# EAGLE board 9x9_backpack (EAGLE 6.2)

Size 45.72 x 45.72 mm. Coordinates in mm from the lower left corner, seen from the top.
Outline: 0,43.18 0,2.54 arc90 2.54,0 43.18,0 arc90 45.72,2.54 45.72,43.18 arc90 43.18,45.72 2.54,45.72 arc90 0,43.18
Copper layers (1*16): Top 0.035mm / dielectric 1.5mm / Bottom 0.035mm
Design rules: minimum track width 10mil, minimum drill 12mil, track to track 6mil, track to pad 6mil, pad to pad 6mil, via to via 6mil, smd to smd 0mil, copper to edge 20mil, drill to drill 10mil, minimum pad ring 10mil, minimum via ring 6mil, stop-mask expansion 2mil, vias tented up to drill 100mil, thermal gap 10mil
Holes 3.2 mm at 5.08,5.08 5.08,40.64 40.64,5.08 40.64,40.64

## Footprints (pad centres in the part's own frame; a part is rotated, then mirrored left to right if it is on the bottom)
LED3MM = drill 0.813 octagon: A -1.27,0; K 1.27,0
1X01 = drill 1.016 octagon: 1 0,0
SOIC14 = smd 0.61 x 2.21: 1 -3.81,-2.603; 2 -2.54,-2.603; 3 -1.27,-2.603; 4 0,-2.603; 5 1.27,-2.603; 6 2.54,-2.603; 7 3.81,-2.603; 8 3.81,2.603; 9 2.54,2.603; 10 1.27,2.603; 11 0,2.603; 12 -1.27,2.603; 13 -2.54,2.603; 14 -3.81,2.603
1X04_LOCK = drill 1.016 pad 1.88 square: 1 0,0.127 | drill 1.016 pad 1.88: 2 2.54,-0.127; 3 5.08,0.127; 4 7.62,-0.127
1X06_LOCK = drill 1.016 pad 1.88: 1 0,0; 2 2.54,-0.254; 3 5.08,0; 4 7.62,-0.254; 5 10.16,0; 6 12.7,-0.254
R-6 = drill 0.6 pad 1.27: P$1 -3,0; P$2 3,0
C025-025X050 = drill 0.813 octagon: 1 -1.27,0; 2 1.27,0
SO20L = smd 0.66 x 2.032: 1 -5.715,-5.029; 2 -4.445,-5.029; 3 -3.175,-5.029; 4 -1.905,-5.029; 5 -0.635,-5.029; 6 0.635,-5.029; 7 1.905,-5.029; 8 3.175,-5.029; 9 4.445,-5.029; 10 5.715,-5.029; 11 5.715,5.029; 12 4.445,5.029; 13 3.175,5.029; 14 1.905,5.029; 15 0.635,5.029; 16 -0.635,5.029; 17 -1.905,5.029; 18 -3.175,5.029; 19 -4.445,5.029; 20 -5.715,5.029

## Placement (x,y rotation side)
00  [LED3MM]  2.54,2.54 0 top
01  [LED3MM]  7.62,2.54 0 top
02  [LED3MM]  12.7,2.54 0 top
03  [LED3MM]  17.78,2.54 0 top
04  [LED3MM]  22.86,2.54 0 top
05  [LED3MM]  27.94,2.54 0 top
06  [LED3MM]  33.02,2.54 0 top
07  [LED3MM]  38.1,2.54 0 top
08  [LED3MM]  43.18,2.54 0 top
10  [LED3MM]  2.54,7.62 0 top
11  [LED3MM]  7.62,7.62 0 top
12  [LED3MM]  12.7,7.62 0 top
13  [LED3MM]  17.78,7.62 0 top
14  [LED3MM]  22.86,7.62 0 top
15  [LED3MM]  27.94,7.62 0 top
16  [LED3MM]  33.02,7.62 0 top
17  [LED3MM]  38.1,7.62 0 top
18  [LED3MM]  43.18,7.62 0 top
20  [LED3MM]  2.54,12.7 0 top
21  [LED3MM]  7.62,12.7 0 top
22  [LED3MM]  12.7,12.7 0 top
23  [LED3MM]  17.78,12.7 0 top
24  [LED3MM]  22.86,12.7 0 top
25  [LED3MM]  27.94,12.7 0 top
26  [LED3MM]  33.02,12.7 0 top
27  [LED3MM]  38.1,12.7 0 top
28  [LED3MM]  43.18,12.7 0 top
30  [LED3MM]  2.54,17.78 0 top
31  [LED3MM]  7.62,17.78 0 top
32  [LED3MM]  12.7,17.78 0 top
33  [LED3MM]  17.78,17.78 0 top
34  [LED3MM]  22.86,17.78 0 top
35  [LED3MM]  27.94,17.78 0 top
36  [LED3MM]  33.02,17.78 0 top
37  [LED3MM]  38.1,17.78 0 top
38  [LED3MM]  43.18,17.78 0 top
40  [LED3MM]  2.54,22.86 0 top
41  [LED3MM]  7.62,22.86 0 top
42  [LED3MM]  12.7,22.86 0 top
43  [LED3MM]  17.78,22.86 0 top
44  [LED3MM]  22.86,22.86 0 top
45  [LED3MM]  27.94,22.86 0 top
46  [LED3MM]  33.02,22.86 0 top
47  [LED3MM]  38.1,22.86 0 top
48  [LED3MM]  43.18,22.86 0 top
50  [LED3MM]  2.54,27.94 0 top
51  [LED3MM]  7.62,27.94 0 top
52  [LED3MM]  12.7,27.94 0 top
53  [LED3MM]  17.78,27.94 0 top
54  [LED3MM]  22.86,27.94 0 top
55  [LED3MM]  27.94,27.94 0 top
56  [LED3MM]  33.02,27.94 0 top
57  [LED3MM]  38.1,27.94 0 top
58  [LED3MM]  43.18,27.94 0 top
60  [LED3MM]  2.54,33.02 0 top
61  [LED3MM]  7.62,33.02 0 top
62  [LED3MM]  12.7,33.02 0 top
63  [LED3MM]  17.78,33.02 0 top
64  [LED3MM]  22.86,33.02 0 top
65  [LED3MM]  27.94,33.02 0 top
66  [LED3MM]  33.02,33.02 0 top
67  [LED3MM]  38.1,33.02 0 top
68  [LED3MM]  43.18,33.02 0 top
70  [LED3MM]  2.54,38.1 0 top
71  [LED3MM]  7.62,38.1 0 top
72  [LED3MM]  12.7,38.1 0 top
73  [LED3MM]  17.78,38.1 0 top
74  [LED3MM]  22.86,38.1 0 top
75  [LED3MM]  27.94,38.1 0 top
76  [LED3MM]  33.02,38.1 0 top
77  [LED3MM]  38.1,38.1 0 top
78  [LED3MM]  43.18,38.1 0 top
80  [LED3MM]  2.54,43.18 0 top
81  [LED3MM]  7.62,43.18 0 top
82  [LED3MM]  12.7,43.18 0 top
83  [LED3MM]  17.78,43.18 0 top
84  [LED3MM]  22.86,43.18 0 top
85  [LED3MM]  27.94,43.18 0 top
86  [LED3MM]  33.02,43.18 0 top
87  [LED3MM]  38.1,43.18 0 top
88  [LED3MM]  43.18,43.18 0 top
H0  [1X01]  11.43,5.08 0 bottom
H1  [1X01]  13.97,5.08 0 bottom
H2  [1X01]  16.51,5.08 0 bottom
H3  [1X01]  19.05,5.08 0 bottom
H4  [1X01]  21.59,5.08 0 bottom
H5  [1X01]  24.13,5.08 0 bottom
H6  [1X01]  26.67,5.08 0 bottom
H7  [1X01]  29.21,5.08 0 bottom
H8  [1X01]  31.75,5.08 0 bottom
H9  [1X01]  34.29,5.08 0 bottom
H10  [SOIC14]  33.02,22.86 180 bottom
H11  [1X04_LOCK]  17.78,40.64 0 bottom
H12  [1X06_LOCK]  35.56,40.64 0 bottom
H13  [R-6]  22.86,35.56 0 bottom
H14  [C025-025X050]  12.7,35.56 0 bottom
H15  [SO20L]  15.24,20.32 180 bottom
H16  [1X01]  12.7,30.48 0 bottom
H17  [1X01]  10.16,30.48 0 bottom
H18  [1X01]  15.24,30.48 0 bottom
H19  [1X01]  17.78,30.48 0 bottom
H20  [1X01]  20.32,30.48 0 bottom
H21  [LOGO]  40.64,14.35 0 bottom

## Library data of the parts
00 01-08 10-18 20-28 30-38 40-48 50-58 60-68 70-78 80-88 = led
H0 H1-H9 H16-H20 = pinhead
H10 = avr-5-4.16
H11 H12 = SparkFun
H13 = Mrule
H14 = ref-packages
H15 = cypress
H21 = mrule2

## Nets
D: 00.A 11.A 22.A 33.A 44.A 55.A 66.A 77.A 88.A H9.1 H10.8 H12.5 H15.18
S0: 00.K 01.A 02.A 03.A 04.A 05.A 06.A 07.A 08.A 10.K 20.K 30.K 40.K 50.K 60.K 70.K 80.K H0.1 H10.3 H15.9
S1: 01.K 10.A 11.K 12.A 13.A 14.A 15.A 16.A 17.A 18.A 21.K 31.K 41.K 51.K 61.K 71.K 81.K H1.1 H10.5 H15.16
S2: 02.K 12.K 20.A 21.A 22.K 23.A 24.A 25.A 26.A 27.A 28.A 32.K 42.K 52.K 62.K 72.K 82.K H2.1 H10.6 H15.15
S3: 03.K 13.K 23.K 30.A 31.A 32.A 33.K 34.A 35.A 36.A 37.A 38.A 43.K 53.K 63.K 73.K 83.K H3.1 H10.7 H12.1 H15.17
S4: 04.K 14.K 24.K 34.K 40.A 41.A 42.A 43.A 44.K 45.A 46.A 47.A 48.A 54.K 64.K 74.K 84.K H4.1 H10.13 H15.14
S5: 05.K 15.K 25.K 35.K 45.K 50.A 51.A 52.A 53.A 54.A 55.K 56.A 57.A 58.A 65.K 75.K 85.K H5.1 H10.12 H15.13
S6: 06.K 16.K 26.K 36.K 46.K 56.K 60.A 61.A 62.A 63.A 64.A 65.A 66.K 67.A 68.A 76.K 86.K H6.1 H10.11 H15.12
S7: 07.K 17.K 27.K 37.K 47.K 57.K 67.K 70.A 71.A 72.A 73.A 74.A 75.A 76.A 77.K 78.A 87.K H7.1 H10.10 H15.11
S8: 08.K 18.K 28.K 38.K 48.K 58.K 68.K 78.K 80.A 81.A 82.A 83.A 84.A 85.A 86.A 87.A 88.K H8.1 H10.9 H12.2 H15.19
S$1: H10.14 H11.1 H12.6 H14.1 H15.10
S$2: H10.1 H11.4 H12.4 H13.P$2 H14.2 H15.20
S$3: H10.4 H12.3 H13.P$1 H15.1
S$4: H10.2 H11.2 H15.2
S$5: H11.3 H15.3
S$6: H15.8 H20.1
S$7: H15.7 H19.1
S$8: H15.6 H18.1
S$9: H15.5 H16.1
S$10: H15.4 H17.1

## Tracks (layer width: path | path; a pad name or v marks a point on that pad's centre or on a via)
D  (12 unrouted)
S0  (19 unrouted)
S1  (19 unrouted)
S2  (19 unrouted)
S3  (20 unrouted)
S4  (19 unrouted)
S5  (19 unrouted)
S6  (19 unrouted)
S7  (19 unrouted)
S8  (20 unrouted)
S$1  (4 unrouted)
S$2  (5 unrouted)
S$3  (3 unrouted)
S$4  (2 unrouted)
S$5  (1 unrouted)
S$6  (1 unrouted)
S$7  (1 unrouted)
S$8  (1 unrouted)
S$9  (1 unrouted)
S$10  (1 unrouted)

## Text on the board
bPlace: + | GND | 61659 | slowdanger@gmail.com | Michael Everett Rule